# Altium PCB PCB_SHIELD_UPS.PcbDoc (part 4 of 4)
Units mm, origin at the board's own origin, x right, y up, seen from the top; angles counter-clockwise.
Board outline 85.6 x 54 mm, 2 copper layers (Top Layer, Bottom Layer), stack 1.571 mm thick; 41 components, 25 nets, 168 pads, 97 vias.
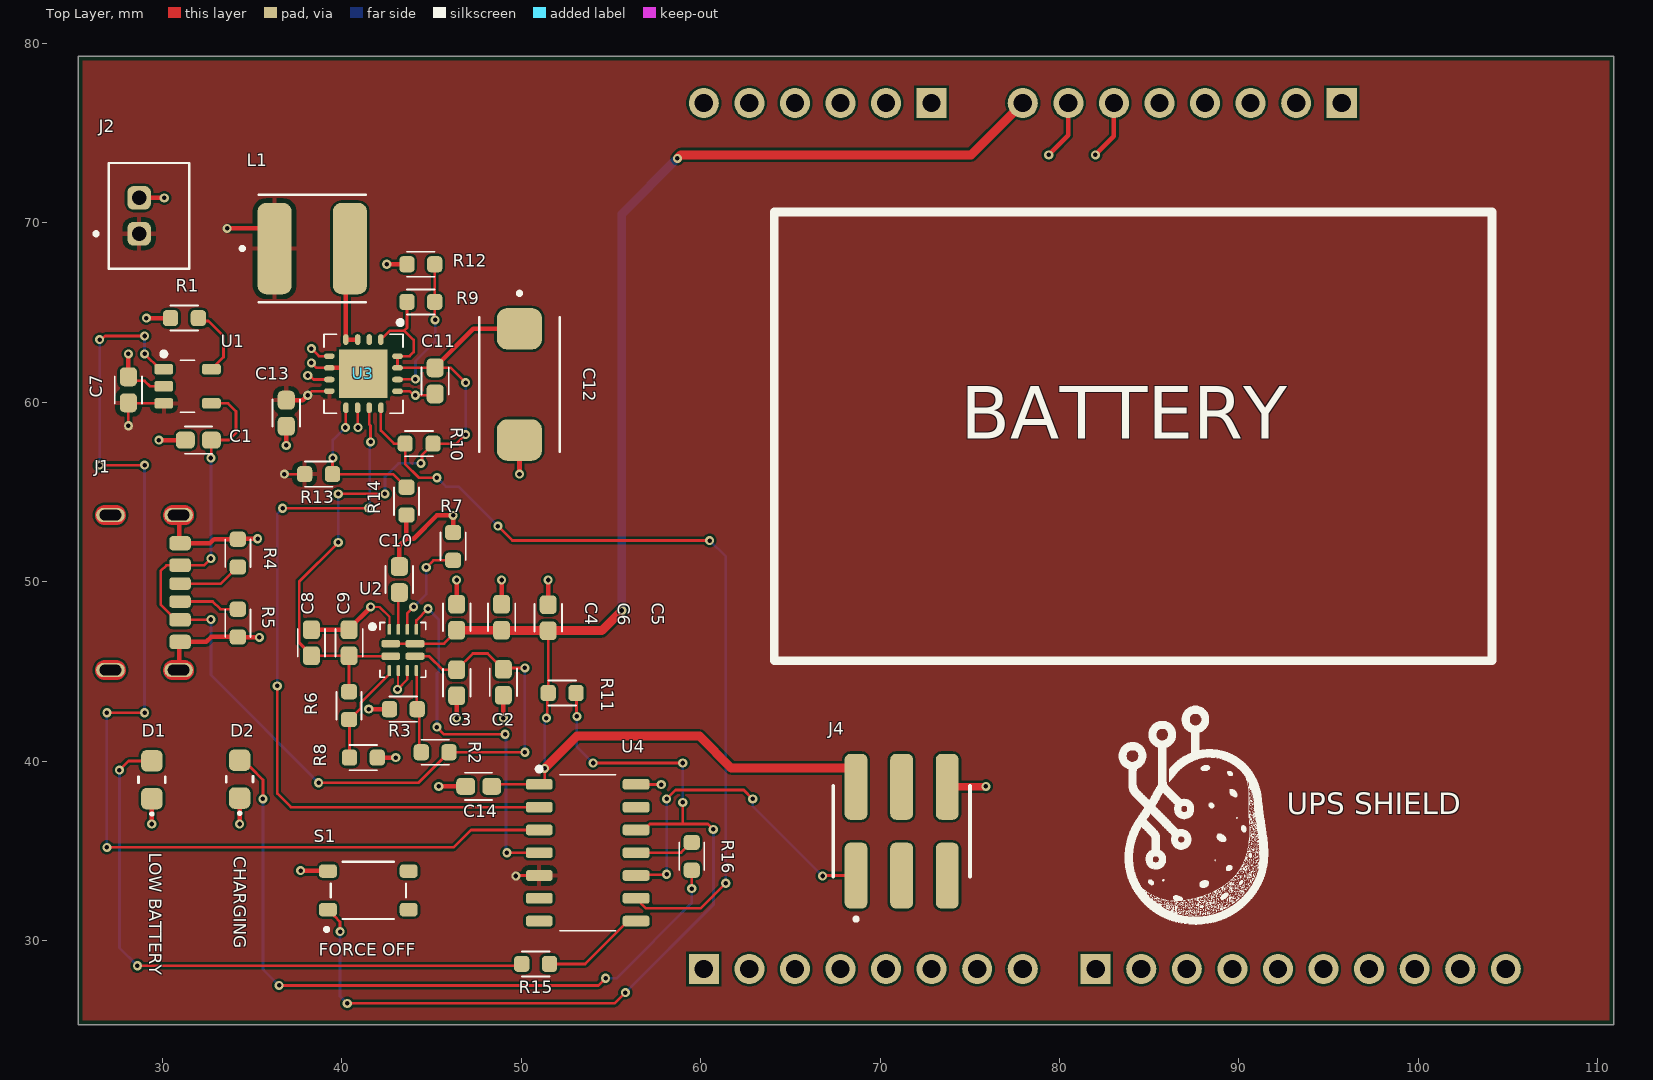
[diagram p0: Top Layer view]

## Part data (continued)
U4: "MCU 8-Bit ATTINY414 AVR RISC 4KB Flash 2.7V to 5.5V 14-Pin SOIC T/R - Tape and Reel", Case/Package=SOIC, Frequency=16MHz, Manufacturer=Microchip, Max Operating Temperature=125°C, Max Supply Voltage=5.5V, Min Operating Temperature=-40°C, Min Supply Voltage=2.7V, Supplier Part Number=ATTINY414-SSFRCT-ND, Category=Microcontrollers, ComponentLink1Description=https://datasheet.octopart.com:443/ATTINY414-SSFR-Microchip-datasheet-150471216.pdf?src-supplier=Microchip, ComponentLink1URL=https://datasheet.octopart.com:443/ATTINY414-SSFR-Microchip-datasheet-150471216.pdf?src-supplier=Microchip, ComponentLink2Description=https://datasheet.octopart.com:443/ATTINY414-SSFR-Microchip-datasheet-147334551.pdf?src-supplier=Microchip, ComponentLink2URL=https://datasheet.octopart.com:443/ATTINY414-SSFR-Microchip-datasheet-147334551.pdf?src-supplier=Microchip, ComponentLink3Description=https://datasheet.octopart.com:443/ATTINY414-SSFR-Microchip-datasheet-95794647.pdf?src-supplier=SHENGYU+ELECTRONICS, ComponentLink3URL=https://datasheet.octopart.com:443/ATTINY414-SSFR-Microchip-datasheet-95794647.pdf?src-supplier=SHENGYU+ELECTRONICS, ComponentLink4Description=https://datasheet.octopart.com:443/ATTINY414-SSFR-Microchip-datasheet-137472778.pdf?src-supplier=Electro+Sonic, ComponentLink4URL=https://datasheet.octopart.com:443/ATTINY414-SSFR-Microchip-datasheet-137472778.pdf?src-supplier=Electro+Sonic, ComponentLink5Description=https://datasheet.octopart.com:443/ATTINY414-SSFR-Microchip-datasheet-95834867.pdf?src-supplier=Future+Electronics, ComponentLink5URL=https://datasheet.octopart.com:443/ATTINY414-SSFR-Microchip-datasheet-95834867.pdf?src-supplier=Future+Electronics, ComponentLink6Description=https://datasheet.octopart.com:443/ATTINY414-SSFR-Microchip-datasheet-147334554.pdf?src-supplier=Microchip+SCT, ComponentLink6URL=https://datasheet.octopart.com:443/ATTINY414-SSFR-Microchip-datasheet-147334554.pdf?src-supplier=Microchip+SCT, ComponentLink7Description=https://datasheet.octopart.com:443/ATTINY414-SSFR-Microchip-datasheet-92899103.pdf?src-supplier=TME, ComponentLink7URL=https://datasheet.octopart.com:443/ATTINY414-SSFR-Microchip-datasheet-92899103.pdf?src-supplier=TME, ComponentLink8Description=http://sigma.octopart.com:80/188449420/materials_sheet/Microchip-ATTINY414-SSFR.pdf?src-supplier=Compliance+Statements, ComponentLink8URL=http://sigma.octopart.com:80/188449420/materials_sheet/Microchip-ATTINY414-SSFR.pdf?src-supplier=Compliance+Statements, ComponentLink9Description=http://sigma.octopart.com:80/rohs_statement/Microchip-company-71.pdf?src-supplier=Compliance+Statements, ComponentLink9URL=http://sigma.octopart.com:80/rohs_statement/Microchip-company-71.pdf?src-supplier=Compliance+Statements, ComponentLink10Description=http://sigma.octopart.com:80/reach_statement/Microchip-company-70.pdf?src-supplier=Compliance+Statements, ComponentLink10URL=http://sigma.octopart.com:80/reach_statement/Microchip-company-70.pdf?src-supplier=Compliance+Statements, ComponentLink11Description=http://sigma.octopart.com:80/conflict_mineral_statement/Microchip-company-69.pdf?src-supplier=Compliance+Statements, ComponentLink11URL=http://sigma.octopart.com:80/conflict_mineral_statement/Microchip-company-69.pdf?src-supplier=Compliance+Statements, ComponentLink12Description=http://sigma.octopart.com:80/conflict_mineral_statement/Microchip-company-68.pdf?src-supplier=Compliance+Statements, ComponentLink12URL=http://sigma.octopart.com:80/conflict_mineral_statement/Microchip-company-68.pdf?src-supplier=Compliance+Statements, Core Architecture=AVR, Country of Assembly=Thailand, Country of Fabrication="Taiwan, United States of America", Country of Origin="Taiwan, Thailand", Data Bus Width=8b, Export Control Classification Number (ECCN) Code=EAR99, Harmonized Tariff Schedule (HTS) Code=8542.31.0015, Height=1.75mm, Interface="2-Wire, I2C, IrDA, SPI, UART, USART", Lifecycle Status=Production, Manufacturer Part Number=ATTINY414-SSFR, Memory Format=FLASH, Memory Size=4kB, Number of A/D Converters=1, Number of ADC Channels=10, Number of I2C Channels=1, Number of I/Os=12, Number of PWM Channels=6, Number of SPI Channels=1, Number of Timers/Counters=3, Number of UART Channels=1, Packaging="Cut Tape", Pins=14, Pricing="1=0,71, 25=0,65, 100=0,59 (USD)", Projected EOL Date=2044-09-13, RAM Size=256B, RoHS=Compliant, Stock=15503, Supplier=DigiKey, Supplier 1=DigiKey, Supplier Part Number 1=ATTINY414-SSFRCT-ND

## Free pads (board coordinates)
  round 1.676 hole 1.016: 3V3(88.113,76.684) 5V(85.573,76.684) A1(70.333,76.684) A2(67.793,76.684) A3(65.253,76.684) A4(62.713,76.684) A4_SDA(102.337,28.424) A5(60.173,76.684) A5_SCL(104.877,28.424) AREF(99.797,28.424) D1(62.713,28.424) D2(65.253,28.424) D3(67.793,28.424) D4(70.333,28.424) D5(72.873,28.424) D6(75.413,28.424) D7(77.953,28.424) D9(84.557,28.424) D10(87.097,28.424) D11(89.637,28.424) D12(92.177,28.424) D13(94.717,28.424) GND_1(80.493,76.684) GND_2(83.033,76.684) GND_3(97.257,28.424) IOREF(93.193,76.684) RST(90.653,76.684) VIN(77.953,76.684)
  rect 1.676x1.676 / inner round 1.676 / far side rect 1.676x1.676 hole 1.016: A0(72.873,76.684) D0(60.173,28.424) D8(82.017,28.424) P1(95.733,76.684)

## Via types
v1: diameter 0.508, hole 0.254, Top Layer to Bottom Layer, tented both sides, 97 vias

## Nets (pads, with @x,y where several pads share a name; then routed paths per layer and width w, separated by ;. In a path a pad name is that pad's centre, name@x,y a point inside that pad or via, vN(x,y) a via of type N, cw(c..) or ccw(c..) an arc to the next point about the centre after c; other vN are vias at no path point)
+5: C1.2 C2.1 C3.2 J1.A9 J1.B9 R2.2 U1.4 U2.7 | length 54.5
  Top Layer w0.15: J1.A9@30.76,47.88 29.9,48.74 29.9,50.6 30.22,50.92 J1.B9 32.32,50.92 v1(32.7,51.3) ; J1.A9 32.68,47.88 v1(32.7,47.9) ; v1(32.7,56.9) 32.725,56.925 C1.2 33.7,57.9 34.1,58.3 34.1,59.5 33.65,59.95 U1.4 ; v1(38.7,38.8) 44.275,38.8 R2.2 v1(50.2,40.5) ; U2.7 44.85,45.85 45.6,45.1 C3.2 47.3,46 48.125,46 C2.1 49.075,45.2 v1(50.2,45.2)
  Bottom Layer w0.15: v1(32.7,47.9) 32.7,44.8 v1(38.7,38.8) ; v1(32.7,51.3) v1(32.7,56.9) ; v1(50.2,40.5) v1(50.2,45.2)
+VBAT: C7.1 C13.1 J2.1 L1.1 R13.1 U1.3 U3.8 U4.5 | length 11.6
  Top Layer w0.15: v1(28.1,58.7) C7.1 28.125,59.95 U1.3 ; v1(36.8,56) R13.1 ; v1(38.1,60.4) 38.325,60.625 U3.8 ; v1(49.7,33.6) 49.73,33.63 U4.5
  Top Layer w0.254: v1(33.6,69.7) 35.453,69.7 36.25,68.903 L1.1 ; C13.1 37.825,60.125 v1(38.1,60.4)
Batery_Charging: U1.1 U4.3 | length 62.4
  Top Layer w0.15: v1(26.5,56.5) v1(29,56.5) ; v1(26.5,63.5) 26.597,63.5 26.797,63.7 v1(29,63.7) ; v1(26.9,35.2) 46.23,35.2 47.2,36.17 50.97,36.17 U4.3@50.985,36.185 ; v1(26.9,42.7) v1(29,42.7) ; v1(29,62.7) 29.85,61.85 U1.1
  Bottom Layer w0.15: v1(26.5,56.5) v1(26.5,63.5) ; v1(26.9,35.2) v1(26.9,42.7) ; v1(29,42.7) v1(29,56.5) ; v1(29,62.7) v1(29,63.7)
BOOST_OUT: C8.1 C9.2 C11.1 C12.1 R6.2 R9.1 R10.1 U2.2 U3.1 U3.15 U3.16 | length 44.7
  Top Layer w0.15: v1(39.8,52.2) 37.623,50.023 37.623,46.602 38.3,45.925 C8.1 C9.2 ; v1(39.8,54.9) v1(42.4,54.9) ; R6.2 40.4,45.825 40.425,45.85 U2.2 ; U3.1 42.675,64 43.475,64 ; R9.1 43.625,64.15 43.475,64 ; v1(44.4,56.6) 44.468,56.668 44.468,57.068 44.923,57.523 44.923,57.548 R10.1 46.4,57.7 v1(46.9,58.2) ; v1(46.9,61.1) 46.075,61.925 C11.1 U3.15 U3.16 43.775,62.575 44,62.8 44,63.475 43.475,64
  Top Layer w0.254: C11.1@45.2,61.975 47.325,64.1 C12.1
  Bottom Layer w0.15: v1(39.8,52.2) v1(39.8,54.9) ; v1(42.4,54.9) 42.4,55.85 43.15,56.6 v1(44.4,56.6) ; v1(46.9,58.2) v1(46.9,61.1)
EN_BOOST: U3.11 U4.2 | length 41.4
  Top Layer w0.15: v1(36.4,44.2) 36.4,38.2 37.16,37.44 U4.2 ; v1(36.7,54.1) v1(41.5,54.1) ; U3.11 41.525,58.776 41.6,58.701 v1(41.6,57.8)
  Bottom Layer w0.15: v1(36.4,44.2) 36.4,53.8 v1(36.7,54.1) ; v1(41.5,54.1) 41.55,54.15 41.55,57.75 v1(41.6,57.8)
GND: C1.1 C2.2 C3.1 C4.2 C5.1 C6.2 C7.2 C8.2 C9.1 C10.2 C11.2 C12.2 C13.2 C14.1 D1.1 D2.1 J1.A12 J1.B12 J1.S1 J1.S2 J1.S3 J1.S4 J2.2 J4.6 pad.GND_1 pad.GND_2 R1.1 R3.2 R4.2 R5.2 R7.2 R8.2 R12.2 R14.2 S1.3 U1.2 U2.4 U2.5 U2.12 U3.5 U3.6 U3.7 U3.10 U3.13 U3.17 U4.14 | length 70.5
  Top Layer w0.127: v1(41.6,48.6) 42.097,48.6 42.65,48.047 U2.12 ; v1(43.1,44) v1@43.125,44.025 ; U2.4 43.125,45.025 v1@43.125,44.025 ; U2.5 43.65,44.55 v1@43.125,44.025
  Top Layer w0.15: C7.2 28.325,61.2 29,61.2 29.3,60.9 U1.2 ; v1(38.1,61.5) 38.197,61.5 38.422,61.275 U3.7 ; v1(38.3,62.2) 38.575,61.925 U3.6 ; v1(38.3,63) 38.725,62.575 U3.5 ; U3.10 40.888,59.687 40.888,58.612 v1(40.9,58.6) ; U3.13 43.778,60.625 44.003,60.4 45.125,60.4 C11.2 ; U4.14 56.405,38.705 57.795,38.705 v1(57.8,38.7)
  Top Layer w0.254: C7.2@28.1,61.435 v1(28.1,62.7) ; v1(29.1,64.7) R1.1 ; J2.2@29.138,71.4 v1(30.1,71.4) ; v1(29.4,36.5) D1.1@29.4,37.762 ; D1.1@29.4,37.9 D1.1@29.423,37.923 ; v1(29.8,57.9) C1.1@30.762,57.9 ; J1.S2 30.94,45.12 30.94,46.61 J1.A12 32.45,46.65 32.725,46.925 R5.2 ; J1.S1 30.94,53.68 30.94,52.19 J1.B12 32.65,52.15 32.875,52.375 R4.2 ; R5.2@34.138,46.9 34.15,46.912 35.388,46.912 v1(35.4,46.9) ; D2.1@34.277,37.923 D2.1 ; v1(34.3,36.5) D2.1@34.3,37.762 ; R4.2@34.338,52.4 v1(35.3,52.4) ; v1(36.9,57.6) C13.2 ; v1(37.7,33.9) 37.713,33.887 39.212,33.887 S1.3 ; C8.2 C9.1 40.4,47.387 41.6,48.587 v1(41.6,48.6) ; U3.6 40.875,61.925 U3.17 ; v1(41.5,42.9) R3.2 ; R8.2@42.038,40.2 v1(43,40.2) ; v1(42.5,67.7) R12.2@43.462,67.7 ; C10.2 43.2,52 43.6,52.4 ; R14.2 43.6,52.4 ; v1(45.4,38.6) C14.1 ; R7.2@46.2,52.738 v1(46.2,53.7) 45.3,53.7 44,52.4 43.6,52.4 ; v1(46.4,42.4) C3.1@46.4,43.562 ; C4.2@46.4,48.738 v1(46.4,50.1) ; C6.2@48.9,48.738 v1(48.9,50.1) ; v1(49,42.4) 49,43.462 C2.2@49.1,43.562 ; v1(49.9,56) C12.2@49.9,56.962 ; C5.1@51.5,48.738 v1(51.5,50.1) ; v1(79.4,73.8) 80.493,74.893 pad.GND_1 ; v1(82,73.8) 83.033,74.833 pad.GND_2
  Top Layer w0.4: J4.6 75.875,38.575 v1(75.9,38.6)
  other v1: 44.1,60.4
LBO_FLAG: R10.2 U3.12 U4.9 | length 48.1
  Top Layer w0.15: U3.12 42.175,58.425 42.9,57.7 R10.2 43.525,56.575 44.3,55.8 v1(45.3,55.8) ; v1(48.7,53.1) 49.5,52.3 v1(60.5,52.3) ; U4.9 56.96,31.8 60,31.8 v1(61.4,33.2)
  Bottom Layer w0.15: v1(45.3,55.8) 45.8,55.3 46.5,55.3 v1(48.7,53.1) ; v1(60.5,52.3) 61.4,51.4 v1(61.4,33.2)
NetC10_1: C10.1 U2.11 | length 2.1
  Top Layer w0.15: U2.11 43.15,49.35 C10.1
NetD1_2: D1.2 R15.2 | length 34.8
  Top Layer w0.15: v1(27.6,39.5) 28.108,40.008 D1.2@29.4,40.008 ; v1(28.6,28.6) 49.925,28.6 R15.2
  Bottom Layer w0.15: v1(27.6,39.5) 27.6,29.6 v1(28.6,28.6)
NetD2_2: D2.2 R16.2 | length 40.3
  Top Layer w0.15: D2.2 34.684,39.67 34.893,39.67 35.6,38.964 v1(35.6,37.9) ; v1(36.5,27.5) 54.3,27.5 v1(54.7,27.9) ; v1(59.5,32.9) R16.2
  Bottom Layer w0.15: v1(35.6,37.9) 35.6,28.4 v1(36.5,27.5) ; v1(54.7,27.9) 55.3,27.9 59.5,32.1 v1(59.5,32.9)
NetJ1_A5: J1.A5 R4.1 | length 3.6
  Top Layer w0.15: J1.A5 33.25,49.9 34.175,50.825 R4.1
NetJ1_B5: J1.B5 R5.1 | length 3.4
  Top Layer w0.15: J1.B5 32.8,48.9 33.225,48.475 R5.1
NetL1_2: L1.2 U3.3 U3.4 | length 6.4
  Top Layer w0.15: L1.2@40.4,68.525 L1.2@40.425,68.5
  Top Layer w0.254: L1.2@40.225,69.2 U3.4 U3.3
NetR1_2: R1.2 U1.5 | length 3.9
  Top Layer w0.15: R1.2 32.162,64.538 32.562,64.538 33.4,63.7 33.4,62.525 U1.5
NetR2_1: R2.1 R3.1 U2.6 | length 4.7
  Top Layer w0.15: U2.6 44.175,45.025 44.175,42.925 R3.1 44.313,42.787 44.313,40.612 R2.1
NetR6_1: R6.1 R8.1 U2.3 | length 5.8
  Top Layer w0.15: R8.1 40.425,42.3 R6.1 40.425,42.325 41.044,42.944 41.044,43.244 42.65,44.85 U2.3
NetR7_1: R7.1 U2.10 | length 5.6
  Top Layer w0.15: U2.10 43.65,48.25 v1(44,48.6) ; v1(44.7,50.8) 45.1,51.2 R7.1
  Bottom Layer w0.15: v1(44,48.6) 44.7,49.3 v1(44.7,50.8)
NetR9_2: R9.2 R12.1 U3.14 | length 7.9
  Top Layer w0.15: U3.14 43.112,61.287 44.087,61.287 v1(44.1,61.3) ; R12.1 R9.2 45.175,64.625 v1(45.2,64.6)
  Bottom Layer w0.15: v1(44.1,61.3) 44.1,62.3 45.2,63.4 v1(45.2,64.6)
NetR11_2: R11.2 S1.1 U4.12 | length 49.9
  Top Layer w0.15: S1.1 39.289,31.725 39.581,31.434 39.581,31.369 39.9,31.05 v1(39.9,30.5) ; v1(40.3,26.5) 55.2,26.5 v1(55.8,27.1) ; R11.2 53.075,43.775 53.075,42.525 v1(53.1,42.5) ; v1(54,39.9) v1(59,39.9) ; U4.12 56.833,36.17 57.163,36.5 59,36.5 ; v1(59,37.7) 59,36.5 ; v1(60.7,36.2) 60.4,36.5 59,36.5
  Bottom Layer w0.15: v1(39.9,30.5) 39.9,26.9 v1(40.3,26.5) ; v1(53.1,42.5) 53.1,40.8 v1(54,39.9) ; v1(55.8,27.1) 60.7,32 60.712,32 60.712,36.188 v1(60.7,36.2) ; v1(59,37.7) v1(59,39.9)
NetR13_2: R13.2 R14.1 U3.9 | length 8.4
  Top Layer w0.15: v1(39.5,56.9) 39.475,56.875 R13.2 42.85,56 43.575,55.275 R14.1 ; v1(40.2,58.6) 40.213,58.612 40.213,59.687 U3.9
  Bottom Layer w0.15: v1(39.5,56.9) 39.5,57.9 v1(40.2,58.6)
NetR15_1: R15.1 U4.8 | length 5.8
  Top Layer w0.15: R15.1 53.56,28.7 55.95,31.09 U4.8
NetR16_1: R16.1 U4.11 | length 3.3
  Top Layer w0.15: U4.11 58.9,34.9 59.475,35.475 R16.1
PM_OUT: C4.1 C5.2 C6.1 C14.2 J4.2 pad.VIN R11.1 U2.1 U2.8 U4.1 | length 91.9
  Top Layer w0.15: U2.1 U2.8 45.7,46.55 46.4,47.25 C4.1 ; C14.2 48.46,38.71 U4.1 51.081,38.71 51.3,38.929 v1(51.3,39.6) ; C6.1 C6.1@48.913,47.288 ; v1(51.4,42.4) 51.45,42.45 51.45,43.75 R11.1 C5.2 C5.2@51.487,47.288
  Top Layer w0.5: C4.1 C6.1 ; C6.1@48.913,47.288 C5.2@51.487,47.288 ; v1(51.3,39.6) 53.1,41.4 59.937,41.4 61.716,39.62 68.28,39.62 68.66,39.24 J4.2 ; C5.2 54.475,47.275 v1(55.6,48.4) ; v1(58.7,73.6) 58.702,73.6 58.902,73.8 75.07,73.8 pad.VIN
  Bottom Layer w0.15: v1(51.3,39.6) 51.3,42.312 51.388,42.4 v1(51.4,42.4)
  Bottom Layer w0.5: v1(55.6,48.4) 55.6,70.5 v1(58.7,73.6)
UPDI: J4.1 U4.10 | length 18.9
  Top Layer w0.15: U4.10 56.435,33.665 58.065,33.665 v1(58.1,33.7) ; v1(58.1,37.9) 58.6,38.4 62.4,38.4 v1(62.9,37.9) ; v1(66.8,33.6) 66.9,33.6 66.925,33.625 J4.1
  Bottom Layer w0.15: v1(58.1,33.7) v1(58.1,37.9) ; v1(62.9,37.9) 62.9,37.5 v1(66.8,33.6)
USB_Present: U2.9 U4.4 | length 20.7
  Top Layer w0.15: U2.9 44.15,47.85 v1(44.8,48.5) ; v1(45.3,41.9) 45.7,41.5 v1(49.1,41.5) ; v1(49.2,34.9) U4.4
  Bottom Layer w0.15: v1(44.8,48.5) 45.4,47.9 45.4,44.998 45.3,44.898 v1(45.3,41.9) ; v1(49.1,41.5) 49.15,41.45 49.15,34.95 v1(49.2,34.9)
pads on no net: J4.3 J4.4 J4.5 S1.2 S1.4 U3.2 U4.6 U4.7 U4.13

## Polygon pours and split planes (outlines as drawn)
+VBAT on Top Layer "+VBAT_L01_P000" (solid, pour order 0): 25.2,25.3 25.2,79.3 110.9,79.3 110.9,25.3
GND on Bottom Layer "GND_L02_P001" (solid, pour order 1): 25.2,25.3 25.2,79.3 110.9,79.3 110.9,25.3

## Silkscreen, mask and mechanical layers (free items; w line width, h text height)
Top Overlay:
  drawing of 36 lines, arcs and shapes, not listed
  text "BATTERY" at 74.5,57 h5
  text "UPS SHIELD" at 92.654,37.054 h1.2
  text "LOW BATTERY" at 29.014,34.9 h1.2 r270
  text "CHARGING" at 33.714,34.7 h1.2 r270
  text "FORCE OFF" at 38.7,28.914 h1.2

## Text inside footprints (layer, text, board x,y; h text height)
U4: Top 3D Body "1" at 52.176,38.202 h0.75